# Altium PCB PCB3.PcbDoc
Units mil, origin at the board's own origin, x right, y up, seen from the top; angles counter-clockwise.
Board outline 6000 x 4000 mil, 2 copper layers (Top Layer, Bottom Layer); 23 components, 20 nets, 56 pads, 0 vias.
Unrouted connection lines stored in the file: 27.
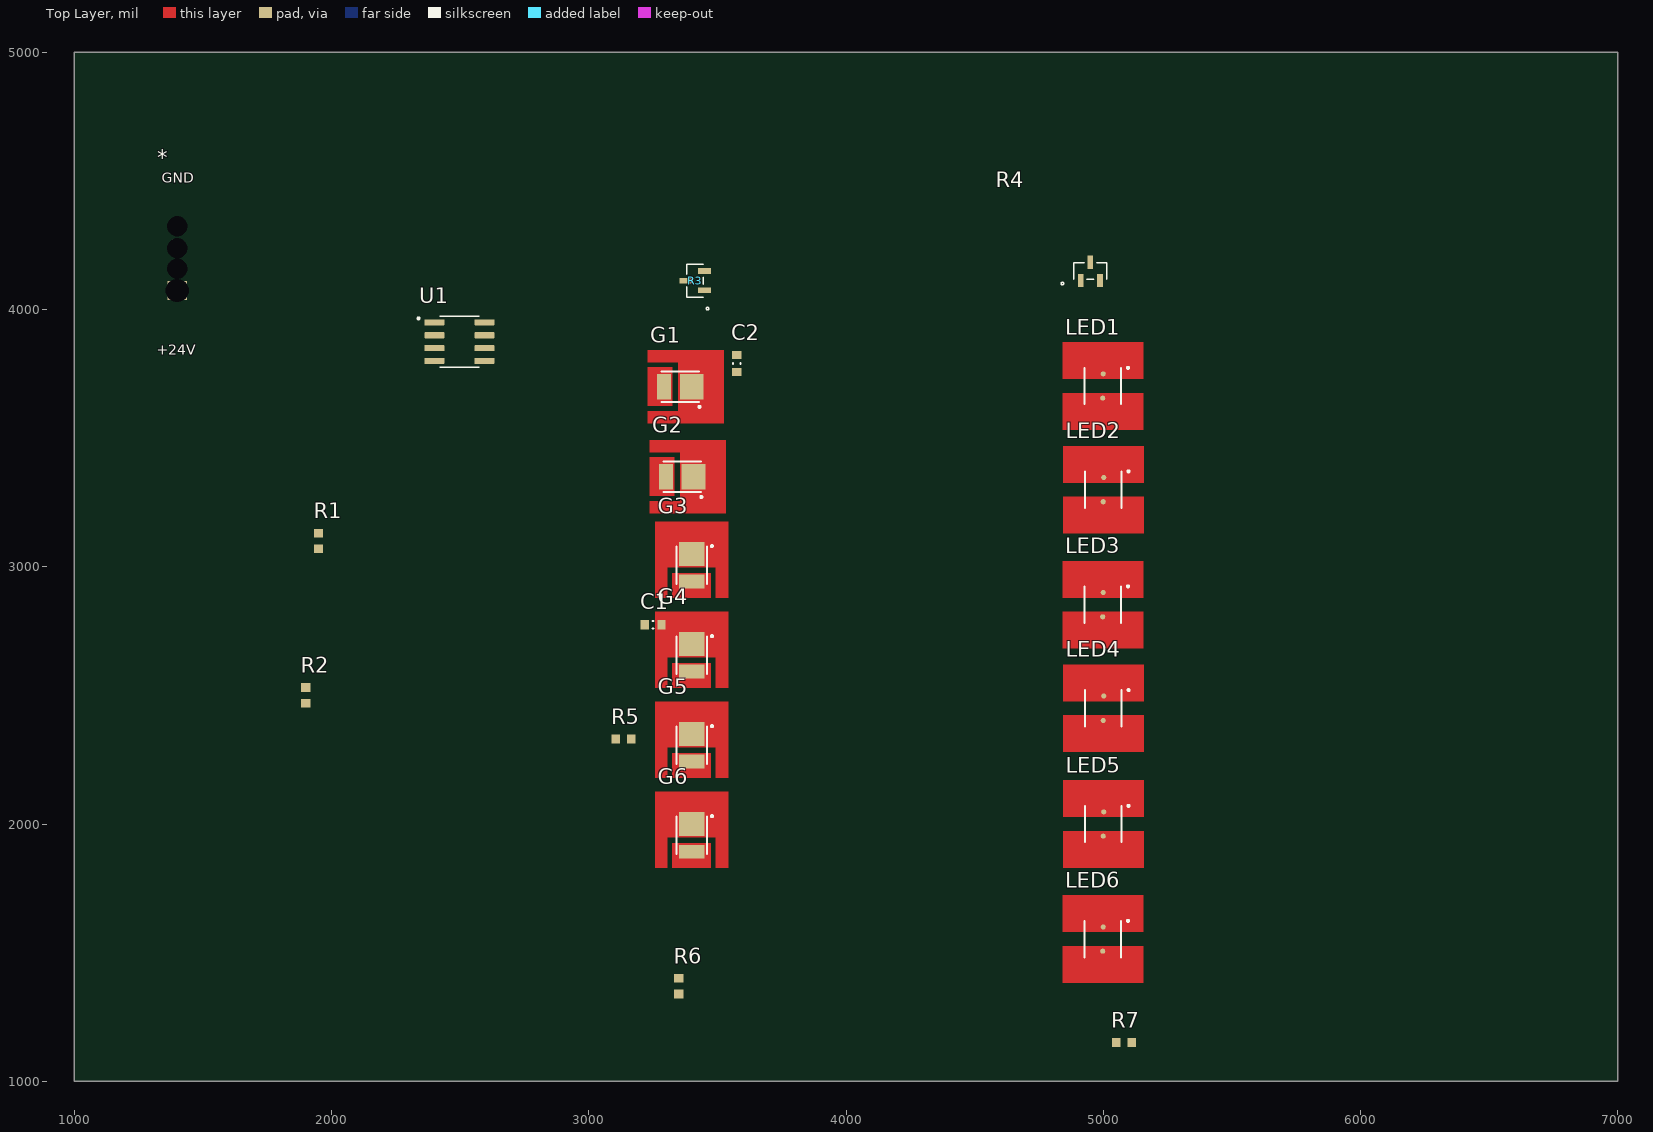
[diagram p0: Top Layer view]
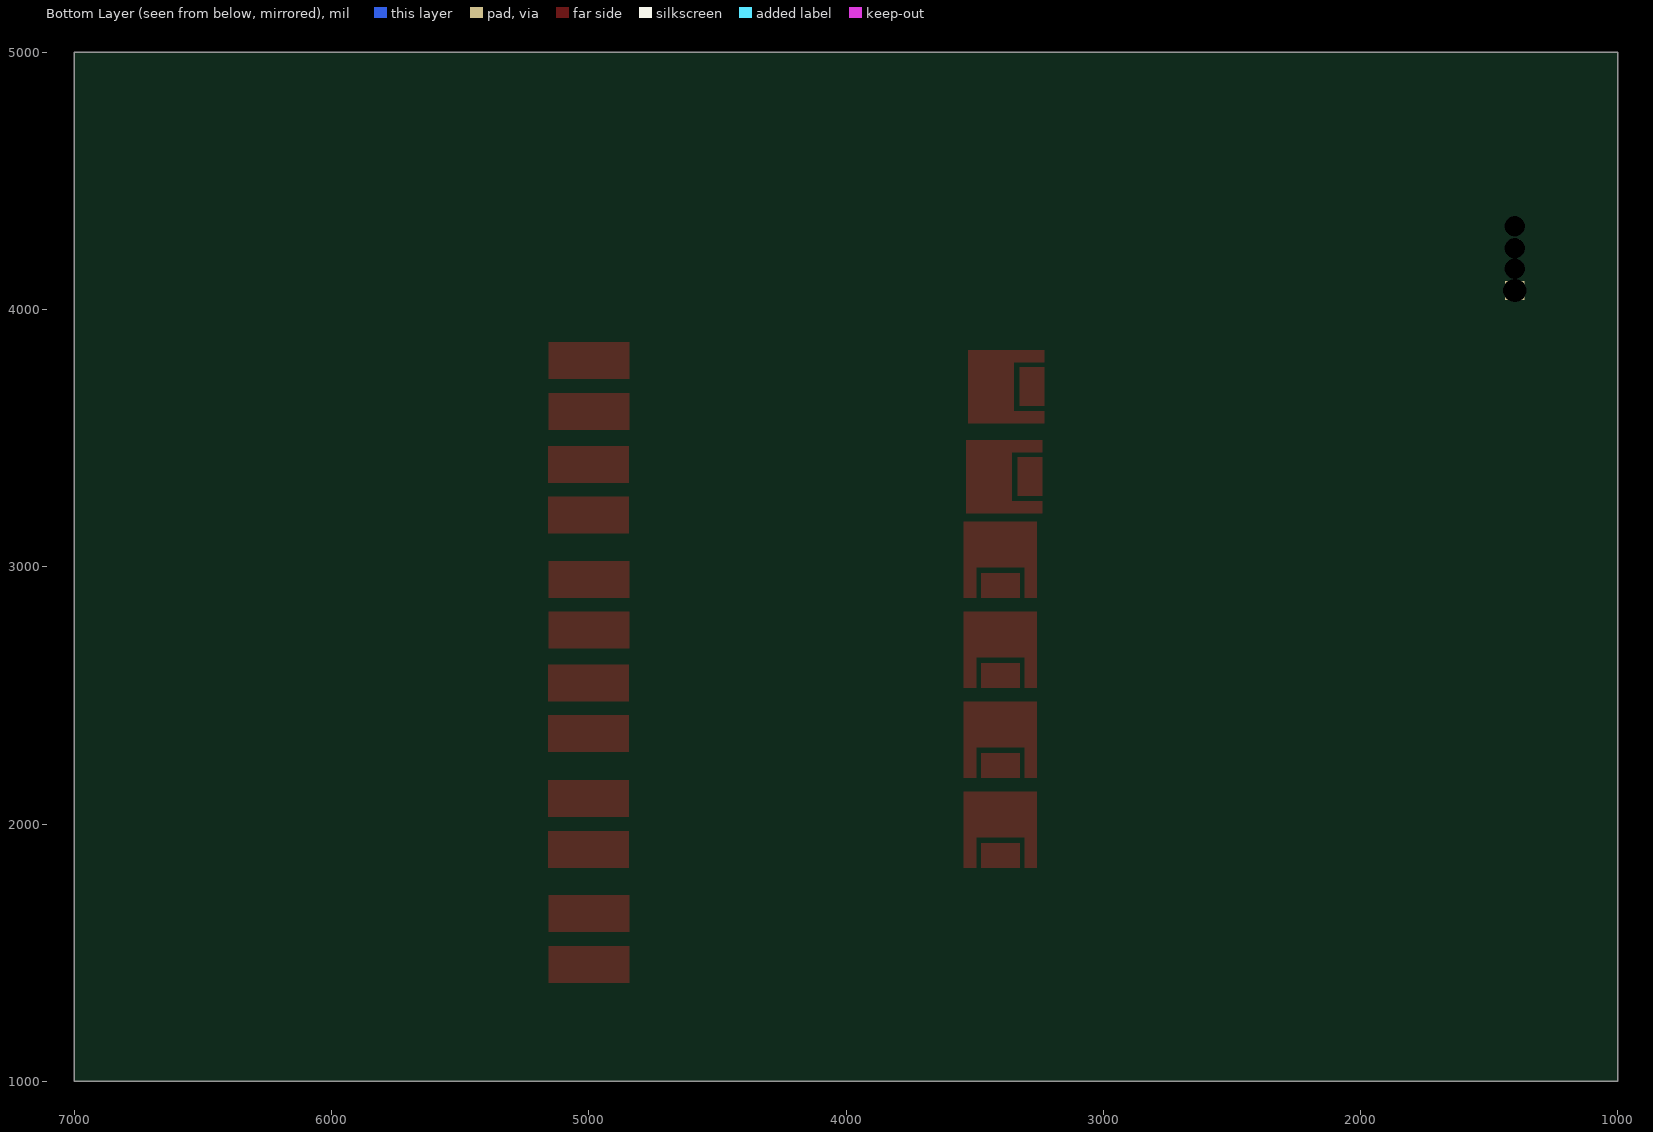
[diagram p1: Bottom Layer view, seen from below]

## Layer stack, top to bottom
Top Solder: solder mask 0.4, Solder Resist, Dk 3.5
Top Layer: signal copper 1.4
Dielectric 1: dielectric 12.6, FR-4, Dk 4.8
Bottom Layer: signal copper 1.4
Bottom Solder: solder mask 0.4, Solder Resist, Dk 3.5

## Board outline
1000,1000 7000,1000 7000,5000 1000,5000

## Design rules (kind name [scope] priority, off if disabled: settings)
Clearance [All] p1: gap=10 ignorepadtopadclearanceinfootprint=FALSE except(0: Arc-Hole Track-Hole SMDPad-Hole THPad-Hole Via-Hole Fill-Hole Poly-Hole Region-Hole Text-Hole)
PolygonConnect [All] p1: connectstyle=Relief reliefconductorwidth=10 reliefentries=4 polygonreliefangle="90 Angle" airgapwidth=10
RoutingVias [All] p1: holewidth=28 width=50 viastyle="Through Hole" minholewidth=28 minwidth=50 maxholewidth=28 maxwidth=50
SolderMaskExpansion [All] p1: expansion=4 istentingtop=FALSE
Width [All] p1: maxlimit=10 minlimit=10 preferedwidth=10
30 further rules are at their usual default settings.

## Components (designator, comment, footprint, x,y, rotation, side; value= is the part's Value field where it differs from the comment)
* "MolexHeader" "4-PIN BARE WIRE PADS" 1400,4178.74 r270 top
C1 "0603" "0603 CAPACITOR (TDK C-SERIES)" 3250,2775 r0 top value=1uF
C2 "0603" "0603 CAPACITOR (TDK C-SERIES)" 3575,3790 r90 top value=1uF
G1 "XZDG25X109FS" "GREEN LED" 3391.14,3700 r0 top
G2 "XZDG25X109FS" "GREEN LED" 3398.43,3350 r0 top
G3 "XZDG25X109FS" "GREEN LED" 3400,3041.14 r90 top
G4 "XZDG25X109FS" "GREEN LED" 3400,2691.14 r90 top
G5 "XZDG25X109FS" "GREEN LED" 3400,2341.14 r90 top
G6 "XZDG25X109FS" "GREEN LED" 3400,1991.14 r90 top
LED1 "OVS5MRBCR4" "RED LED" 4998.03,3702.76 r0 top
LED2 "OVS5MRBCR4" "RED LED" 5000,3300 r0 top
LED3 "OVS5MRBCR4" "RED LED" 4998.03,2852.76 r0 top
LED4 "OVS5MRBCR4" "RED LED" 5000,2450 r0 top
LED5 "OVS5MRBCR4" "RED LED" 5000,2000 r0 top
LED6 "OVS5MRBCR4" "RED LED" 4998.03,1552.76 r0 top
R1 "0603" "0603 RESISTOR (YAGEO)" 1950,3100 r90 top value=100K
R2 "0603" "0603 RESISTOR (YAGEO)" 1900,2500 r90 top
R3 "SSTA06HZGT116" TRANSISTOR 3412.79,4112.5 r90 top
R4 "SSTA06HZGT116" TRANSISTOR 4950,4150 r0 top
R5 "0603" "0603 RESISTOR (YAGEO)" 3135,2330 r0 top value=100K
R6 "0603" "0603 RESISTOR (YAGEO)" 3350,1369.49 r90 top value=50
R7 "0603" "0603 RESISTOR (YAGEO)" 5080.51,1150 r0 top value=5
U1 "SA555DRG4" 555TIMER 2497.24,3875 r0 top

## Footprints (in the part's own frame and the unit in brackets; to place one, negate y for a bottom-side part, rotate by r counter-clockwise, add the part's x,y. Pads: shape width x height; smd on the part's side, far side on the other; paste and mask are expansions set on the pad)
"4-PIN BARE WIRE PADS" [mil] "4-Pin Bare Wire Pads"
  round 75 hole 79.06: 1(-145,0) 2(-60,0) 3(20,0)
  rect 75x75 hole 90: 4(105,0)
  body extent -228,-320 178,93, height 343
555TIMER [mm]
  rrect25% 1.97x0.6 smd: 1(-2.47,1.905) 2(-2.47,0.635) 3(-2.47,-0.635) 4(-2.47,-1.905) 5(2.47,-1.905) 6(2.47,-0.635) 7(2.47,0.635) 8(2.47,1.905)
  silkscreen extent -4.14,-2.52 1.95,2.52, body extent -2.45,-3 2.45,3, height 1.75
"0603 CAPACITOR (TDK C-SERIES)" [mm] "Chip Capacitor, 2-Leads, Body 1.60x0.80mm, IPC Medium Density"
  rect 0.8x0.95 smd: 1(-0.825,0) 2(0.825,0)
  silkscreen extent -0.05,-0.38 0.05,0.38, body extent -0.85,-0.45 0.85,0.45, height 0.9
"0603 RESISTOR (YAGEO)" [mm] "Chip Resistor, 2-Leads, Body 1.60x0.80mm, IPC Medium Density"
  rect 0.85x0.9 smd: 1(-0.775,0) 2(0.775,0)
  body extent -0.85,-0.45 0.85,0.45, height 0.55
"GREEN LED" [mm]
  rect 1.35x2.5 smd: 1(-2.5,0)
  rect 2.35x2.5 smd: 2(0.225,0)
  Top Layer region: -4.1,-3.6 -4.1,-2.4 -1.1,-2.4 -1.1,-1.25 -1.1,1.25 -1.1,2.4 -4.1,2.4 -4.1,3.6 3.4,3.6 3.4,-3.6
  Top Layer region: -4.1,-1.9 -1.7,-1.9 -1.7,-1.25 -1.7,1.25 -1.7,1.9 -4.1,1.9
  silkscreen extent -2.75,-2.07 1.07,1.5, body extent -2.65,-1.35 0.85,1.45, height 0.81
"RED LED" [mm]
  round 0.5 smd: 1(0.05,1.2) 2(0,-1.2)
  Top Layer region: -1.4,0.7 -1.4,1.7 -0.5,1.7 -0.5,2.5 0.5,2.5 0.5,1.7 1.4,1.7 1.4,0.7
  Top Layer region: -1.4,-0.7 -1.4,-1.7 -0.5,-1.7 -0.5,-2.5 0.5,-2.5 0.5,-1.7 1.4,-1.7 1.4,-0.7
  Top Layer region: 4,-0.7 4,-4.3 -3.95,-4.3 -3.95,-0.7
  Top Layer region: 4,0.7 4,4.3 -3.95,4.3 -3.95,0.7
  silkscreen extent -1.8,-1.8 2.57,1.87, body extent -1.8,-1.86 1.7,1.76, height 1.26
TRANSISTOR [mil]
  rect 22x52 smd paste+3.86 mask+4: 1(-37.5,-37.21) 2(37.5,-37.21) 3(0,33.36)
  silkscreen extent -114,-54 64,33, body extent -61,-51 61,51, height 47

## Part data
C1 C2: library part "0603 Ceramic Capacitor", Supplier 1=Digi-Key
G1 G2 G3 G4 G5 G6: library part "GREEN LED", "Green 525nm LED Indication - Discrete 3.5V 1411 (3528 Metric)", Supplier Part Number 1=1497-1345-1-ND, Supplier 1=Digikey
LED1 LED2 LED3 LED4 LED5 LED6: library part "RED LED", "Red 625nm LED Indication - Discrete 2.2V 2-SMD, No Lead", Supplier Part Number 1=365-1546-1-ND, Supplier 1=Digikey
R1 R2 R5 R6 R7: library part "0603 Resistor", Supplier 1=Digi-Key
R3 R4: "No Description Available", Built_By=EMA_Matt, Copyright="Copyright (C) 2018 Accelerated Designs. All rights reserved", Manufacturer_Part_Number=SSTA06HZGT116, RefDes=RefDes, SourceLibrary=Rohm_2019-09-23, Type=DEV, Vendor="ROHM Semiconductor"
U1: "Precision timer for -55 to 85C operation 8-SOIC -40 to 85", Package="SOIC-8 Texas Instruments", Check_prices=https://www.snapeda.com/parts/SA555DRG4/Texas%20Instruments/view-part/387582/?ref=eda, Digi-Key_Part_Number=296-48948-1-ND, MF="Texas Instruments", MP=SA555DRG4, Purchase-URL=https://pricing.snapeda.com/search/part/SA555DRG4/?ref=eda, SnapEDA_Link=https://www.snapeda.com/parts/SA555DRG4/Texas%20Instruments/view-part/387582/?ref=snap

## Nets (pads, with @x,y where several pads share a name; then routed paths per layer and width w, separated by ;. In a path a pad name is that pad's centre, name@x,y a point inside that pad or via, vN(x,y) a via of type N, cw(c..) or ccw(c..) an arc to the next point about the centre after c; other vN are vias at no path point)
GND: C1.2 C2.2 R6.1 R7.1 U1.1
"GREEN_EN (5V)": R3.1
NetC2_1: C2.1 U1.2 U1.6
NetG1_1: G1.1 R3.2
NetG1_2: G1.2 G2.1
NetG2_2: G2.2 G3.1
NetG3_2: G3.2 G4.1
NetG4_2: G4.2 G5.1
NetG5_2: G5.2 G6.1
NetLED1_1: LED1.1 R4.2
NetLED1_2: LED1.2 LED2.1
NetLED2_2: LED2.2 LED3.1
NetLED3_2: LED3.2 LED4.1
NetLED4_2: LED4.2 LED5.1
NetLED5_2: LED5.2 LED6.1
NetLED6_2: LED6.2 R7.2
NetR1_1: R1.1 R5.2 U1.7
NetR2_1: R2.1 R4.1 U1.3
"RED_EN (5V)": C1.1 R1.2 R2.2 U1.8
VCC: R3.3 R4.3
pads on no net: *.1 *.2 *.3 *.4 G6.2 R5.1 R6.2 U1.4 U1.5

## Text inside footprints (layer, text, board x,y; h text height)
*: Top Overlay "GND" at 1340.94,4493.7 h39.37; Top Overlay "+24V" at 1321.26,3824.41 h39.37
R3: Mechanical 7 "Top Padstyle: RX22Y59p71D0T" at 3726,3775 h50 r90; Mechanical 7 "Bottom Padstyle: RX22Y59p71D0T" at 3801,3737.5 h50 r90; Mechanical 7 "Alt 1 Padstyle: OX60Y90D30P" at 3876,3775 h50 r90; Mechanical 7 "Alt 2 Padstyle: OX90Y60D30P" at 3951,3775 h50 r90; Mechanical 7 "0.098in/2.5mm" at 3425.29,4341.5 h25 r90; Mechanical 7 "0.024in/0.61mm" at 3391.93,4266.5 h25 r90; Mechanical 7 "0.075in/1.905mm" at 3607,4018.75 h25 r90; Mechanical 7 "0.02in/0.508mm" at 3243.57,4025 h25 r90; Mechanical 7 "0.118in/2.997mm" at 3143.57,4018.75 h25 r90; Mechanical 7 "0.055in/1.397mm" at 3425.29,3746 h25 r90
R4: Mechanical 7 "Top Padstyle: RX22Y59p71D0T" at 4612.5,3836.79 h50; Mechanical 7 "Bottom Padstyle: RX22Y59p71D0T" at 4575,3761.79 h50; Mechanical 7 "Alt 1 Padstyle: OX60Y90D30P" at 4612.5,3686.79 h50; Mechanical 7 "Alt 2 Padstyle: OX90Y60D30P" at 4612.5,3611.79 h50; Mechanical 7 "0.098in/2.5mm" at 5179,4137.5 h25; Mechanical 7 "0.024in/0.61mm" at 5104,4170.86 h25; Mechanical 7 "0.075in/1.905mm" at 4856.25,3955.79 h25; Mechanical 7 "0.02in/0.508mm" at 4862.5,4319.21 h25; Mechanical 7 "0.118in/2.997mm" at 4856.25,4419.21 h25; Mechanical 7 "0.055in/1.397mm" at 4583.5,4137.5 h25